# EAGLE board UpTo11.MotherBoard (EAGLE 9.6.2)
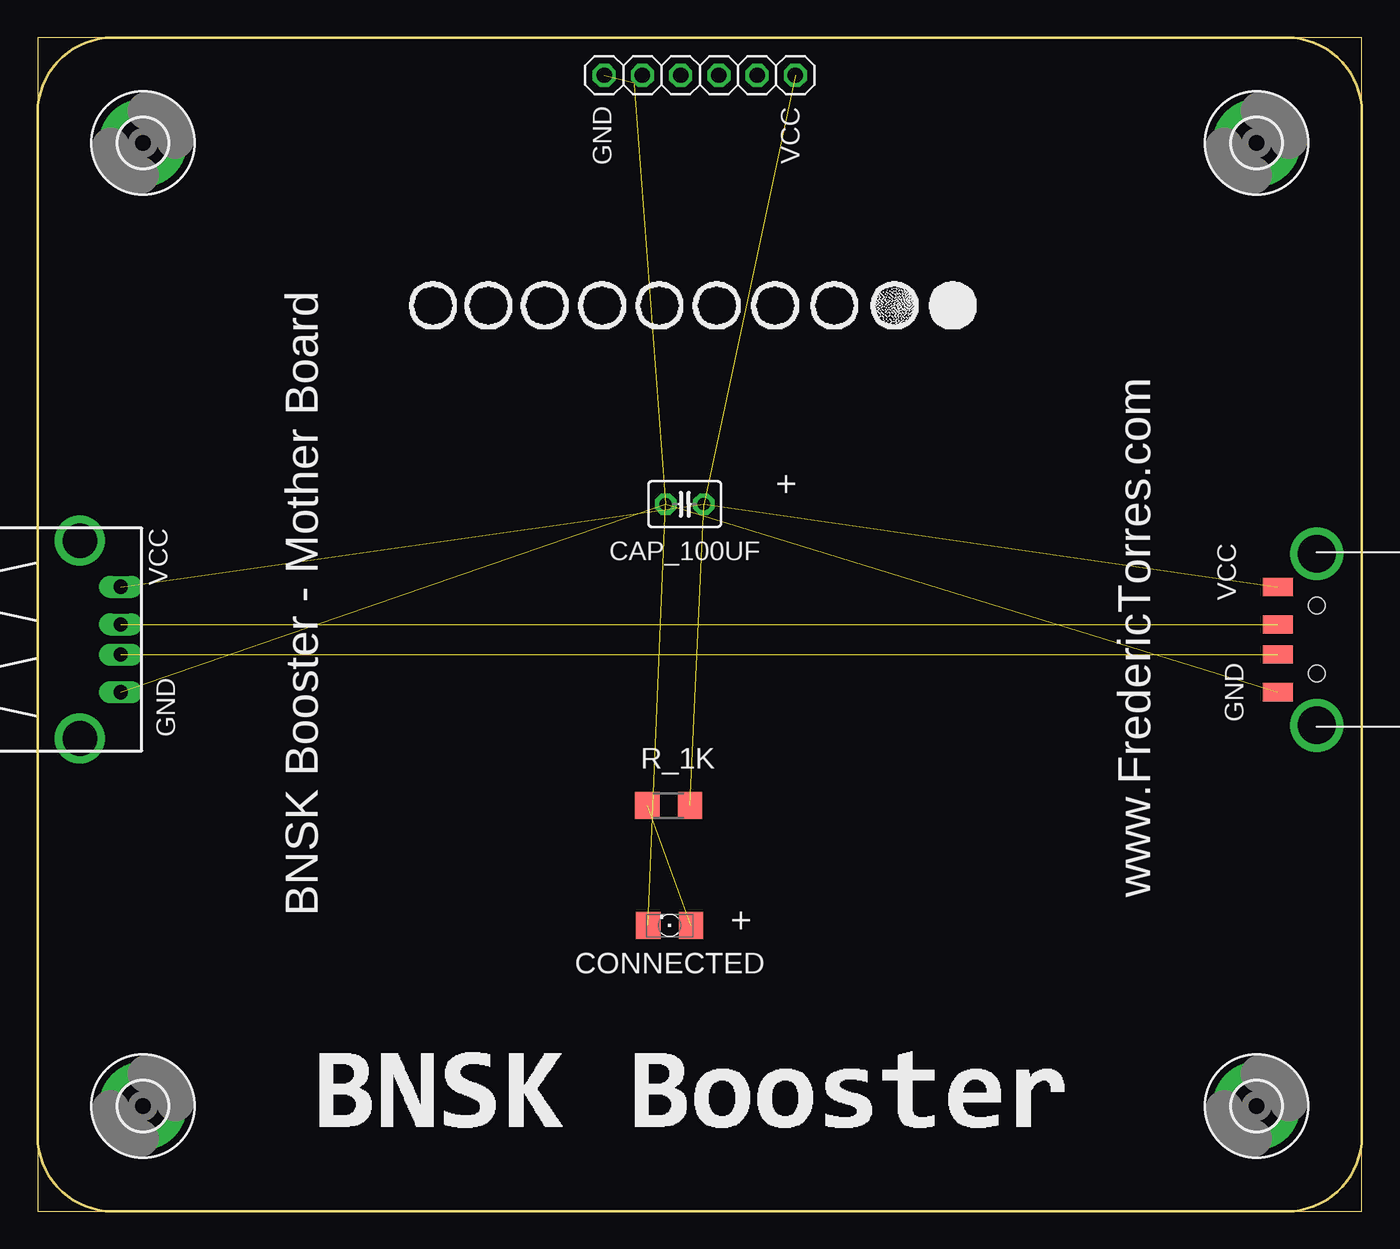
[diagram p0: board, top side]
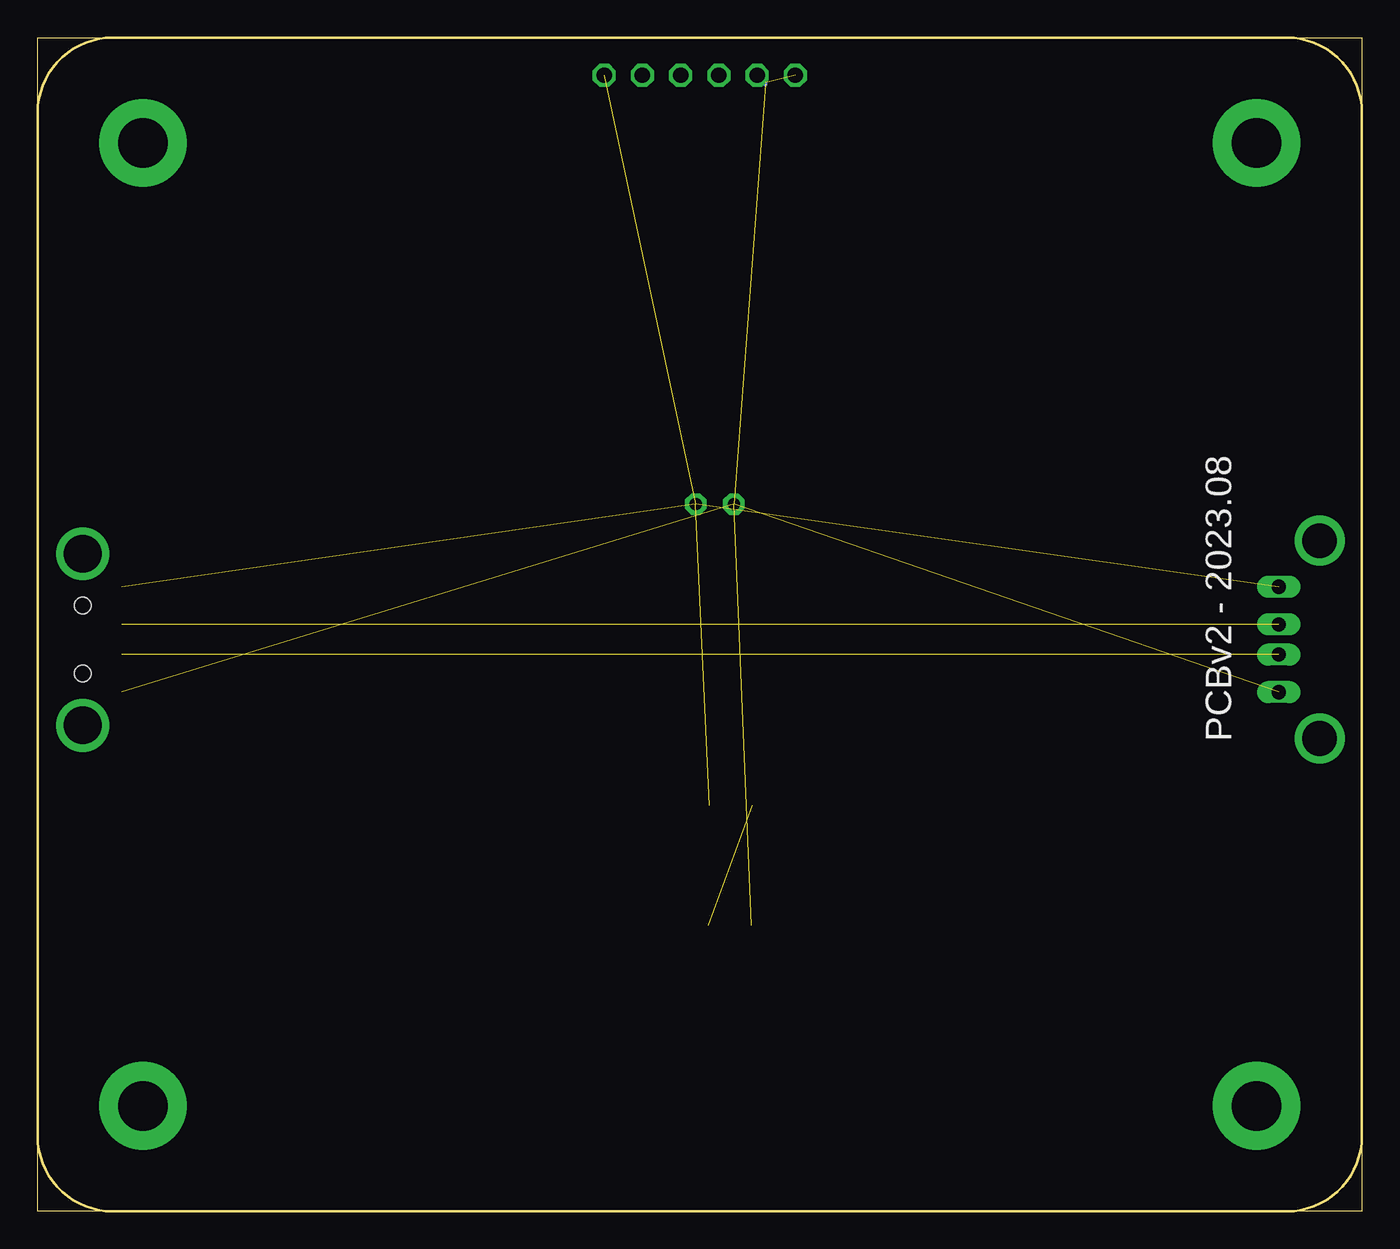
[diagram p1: board, bottom side, seen from below]

Size 88 x 78 mm. Coordinates in mm from the lower left corner, seen from the top.
Outline: 5,0 0,0 0,5
Outline: 83,0 88,0 88,5
Outline: 88,73 88,78 83,78
Outline: 5,78 0,78 0,73
Outline: 0,5 0,73
Outline: 0,73 arc-90 5,78
Outline: 5,78 83,78
Outline: 83,78 arc-90 88,73
Outline: 88,73 88,5
Outline: 88,5 arc-90 83,0
Outline: 83,0 5,0
Outline: 5,0 arc-90 0,5
Copper layers (1*16): Top 0.035mm / dielectric 1.5mm / Bottom 0.035mm
Design rules "default": minimum track width 10mil, minimum drill 24mil, track to track 8mil, track to pad 8mil, pad to pad 8mil, via to via 8mil, smd to smd 8mil, copper to edge 40mil, drill to drill 8mil, minimum pad ring 10mil, minimum via ring 8mil, stop-mask expansion 4mil, vias tented up to drill 0mil, thermal gap 10mil

## Footprints (pad centres in the part's own frame; a part is rotated, then mirrored left to right if it is on the bottom)
C025-030X050 = drill 0.813 pad 1.422 octagon: 1 -1.27,0; 2 1.27,0
USB_HOST-PTH = drill 0.95 long: D+ 1,6.52; D- -1,6.52; GND 3.5,6.52; VBUS -3.5,6.52 | drill 2.3 pad 2.9: S1 -6.57,3.81; S2 6.57,3.81
1206 = smd 1.6 x 1.803: A -1.422,0; C 1.422,0
1X06 = drill 1.016 octagon: 1 -6.35,0; 2 -3.81,0; 3 -1.27,0; 4 1.27,0; 5 3.81,0; 6 6.35,0
3,3-PAD = drill 3.3 pad 5.842: B3,3 0,0
R1206 = smd 1.6 x 1.803: 1 -1.422,0; 2 1.422,0
MOLEX_480371000 = smd 1.2 x 2: 1 3.5,2.6; 2 1,2.6; 3 -1,2.6; 4 -3.5,2.6 | drill 2.5: M1 -5.7,0; M2 5.7,0 | hole 1.1: -2.25,0; 2.25,0

## Placement (x,y rotation side)
CAP_100UF  [C025-030X050]  43,47 0 top
CN1  [USB_HOST-PTH]  -1,38 270 top
CONNECTED  [1206]  42,19 180 top
FRONT_PANEL_INTERFACE  [1X06]  44,75.5 0 top
H1  MOUNT-PAD-ROUND3.3  [3,3-PAD]  7,71 0 top
H2  MOUNT-PAD-ROUND3.3  [3,3-PAD]  7,7 0 top
H3  MOUNT-PAD-ROUND3.3  [3,3-PAD]  81,7 0 top
H4  MOUNT-PAD-ROUND3.3  [3,3-PAD]  81,71 0 top
R_1K  [R1206]  41.93,26.97 0 top
X1  USB-A  [MOLEX_480371000]  85,38 90 top

## Library data of the parts
CAP_100UF CONNECTED FRONT_PANEL_INTERFACE R_1K X1 = adafruit
CN1 = microbuilder
H1-H4 = holes

## Nets
DMINUS: CN1.D- X1.2
DPLUS: CN1.D+ X1.3
GND_EX: CAP_100UF.1 CN1.GND CONNECTED.C FRONT_PANEL_INTERFACE.1 X1.4
N$1: CONNECTED.A R_1K.1
VCC: CAP_100UF.2 CN1.VBUS FRONT_PANEL_INTERFACE.6 R_1K.2 X1.1

## Tracks (layer width: path | path; a pad name or v marks a point on that pad's centre or on a via)
DMINUS  (1 unrouted)
DPLUS  (1 unrouted)
GND_EX  (5 unrouted)
  Bottom 0.254: 39.64,74.89 39.64,75
N$1  (1 unrouted)
VCC  (4 unrouted)

## Text on the board
tNames: GND | VCC | + | VCC | VCC | BNSK Booster - Mother Board | www.FredericTorres.com | GND | GND | +
bNames: PCBv2 - 2023.08